# Altium PCB SourceSelection.PcbDoc
Units mm, origin at the board's own origin, x right, y up, seen from the top; angles counter-clockwise.
Board outline 152.4 x 101.6 mm, 2 copper layers (Top Layer, Bottom Layer); 18 components, 36 nets, 114 pads, 1 vias.
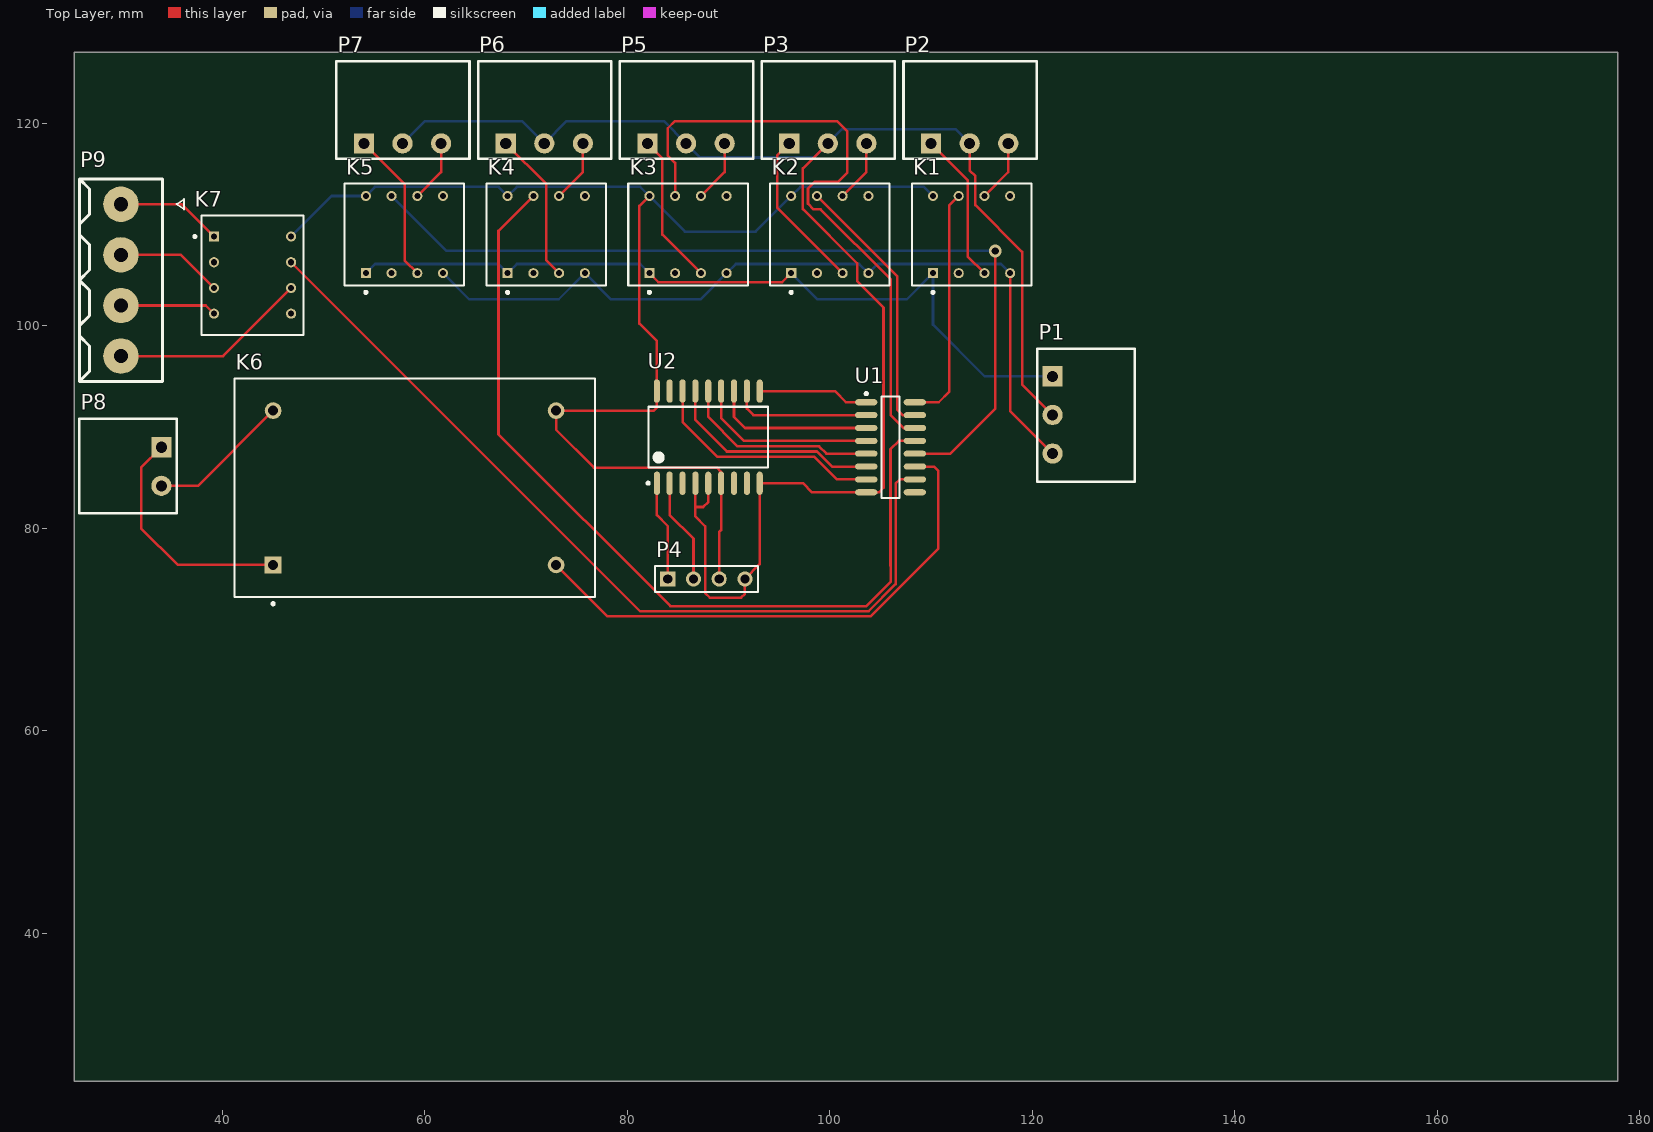
[diagram p0: Top Layer view]
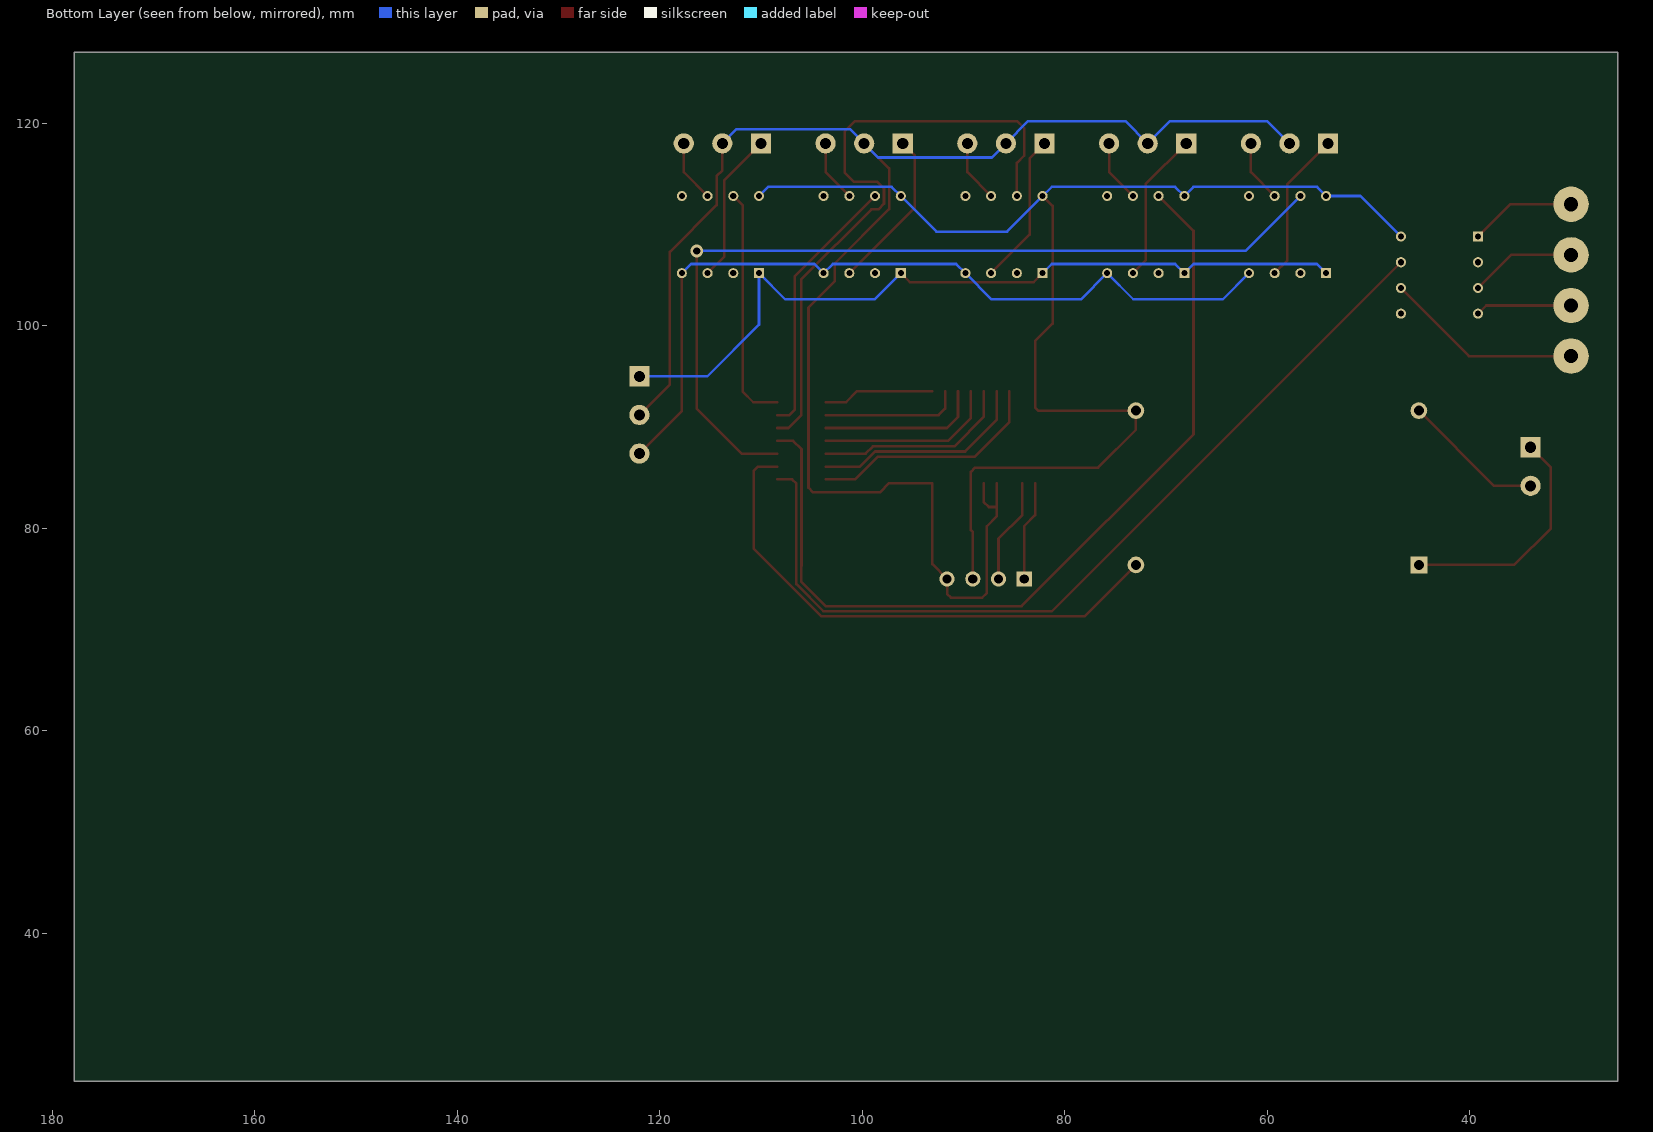
[diagram p1: Bottom Layer view, seen from below]

## Layer stack, top to bottom
Top Layer: signal copper 0.0356
Dielectric: dielectric 0.32, FR-4, Dk 4.8
Bottom Layer: signal copper 0.0356

## Board outline
25.4,25.4 177.8,25.4 177.8,127 25.4,127

## Design rules (kind name [scope] priority, off if disabled: settings)
Clearance [All] p1: gap=0.254
PolygonConnect [All] p1: connectstyle=Relief reliefconductorwidth=0.254 reliefentries=4 polygonreliefangle="90 Angle" airgapwidth=0.254
RoomDefinition "Source Selection" [InComponentClass('Source Selection')] p1: confinementstyle=ConfineIn formatcopy=TRUE lockcomponents=FALSE outline 178.943,27.051 397.51,27.051 397.51,65.659 178.943,65.659
RoutingVias [All] p1: holewidth=0.711 width=1.27 viastyle="Through Hole" minholewidth=0.711 minwidth=1.27 maxholewidth=0.711 maxwidth=1.27
SilkscreenOverComponentPads [All] p1: minsilkscreentomaskgap=0.254
SolderMaskExpansion [All] p1: expansion=0.102
Width [All] p1: maxlimit=0.254 minlimit=0.254 preferedwidth=0.254
27 further rules are at their usual default settings.

## Components (designator, comment, footprint, x,y, rotation, side; value= is the part's Value field where it differs from the comment)
K1 "Relay-DPDT" DIP-P8 114,109 r0 top
K2 "Relay-DPDT" DIP-P8 100,109 r0 top
K3 "Relay-DPDT" DIP-P8 86,109 r0 top
K4 "Relay-DPDT" DIP-P8 72,109 r0 top
K5 "Relay-DPDT" DIP-P8 58,109 r0 top
K6 "Relay-Standby B+" MODULE4 59,84 r0 top
K7 "Relay-Power 240V" DIP-P8 43,105 r270 top
P1 "Audio out" PH_TERM_3 122,95 r270 top
P2 "Audio 1 in" PH_TERM_3 110,118 r0 top
P3 "Audio 2 in" PH_TERM_3 96,118 r0 top
P4 "Header 4" HDR1X4 84,75 r0 top
P5 "Audio 3 in" PH_TERM_3 82,118 r0 top
P6 "Audio 4 in" PH_TERM_3 68,118 r0 top
P7 "Audio 5 in" PH_TERM_3 54,118 r0 top
P8 "Standby" PH_TERM_2 34,88 r270 top
P9 "Header 4" TERM_BLOCK_4_HORZ_RIACON01 30,112 r270 top
U1 "ULN2003AD" D016_N 106,88 r0 top
U2 "MCP23008-E/SO" SOIC-SO18_N 88,89 r90 top

## Footprints (in the part's own frame and the unit in brackets; to place one, negate y for a bottom-side part, rotate by r counter-clockwise, add the part's x,y. Pads: shape width x height; smd on the part's side, far side on the other; paste and mask are expansions set on the pad)
D016_N [mm] "SOIC, 16-Leads, Body 9.9x3.9mm, Pitch 1.27mm, IPC Medium Density"
  oval 2.2x0.6 smd: 1(-2.4,4.445) 2(-2.4,3.175) 3(-2.4,1.905) 4(-2.4,0.635) 5(-2.4,-0.635) 6(-2.4,-1.905) 7(-2.4,-3.175) 8(-2.4,-4.445) 9(2.4,-4.445) 10(2.4,-3.175) 11(2.4,-1.905) 12(2.4,-0.635) 13(2.4,0.635) 14(2.4,1.905) 15(2.4,3.175) 16(2.4,4.445)
  silkscreen extent -2.52,-5 0.9,5.42, body extent -2,-5 2,5, height 1.75
DIP-P8 [mm] "Dual-Pole Dual-Throw Relay; 8 Leads"
  rect 1x1 hole 0.6: 1(-3.81,-3.81)
  round 1 hole 0.6: 2(-1.27,-3.81) 3(1.27,-3.81) 4(3.81,-3.81) 5(3.81,3.81) 6(1.27,3.81) 7(-1.27,3.81) 8(-3.81,3.81)
  silkscreen extent -5.9,-5.82 5.9,5.05
HDR1X4 [mm] "Connector; Header; 4 Position"
  rect 1.5x1.5 hole 0.9: 1(0,0)
  round 1.5 hole 0.9: 2(2.54,0) 3(5.08,0) 4(7.62,0)
  silkscreen extent -1.27,-1.27 8.89,1.27
MODULE4 [mm] "DIP; 4 Round Pins; Row Space 27.94 mm; Pitch 15.24 mm"
  rect 1.65x1.65 hole 1: 1(-13.97,-7.62)
  round 1.65 hole 1: 2(-13.97,7.62) 3(13.97,-7.62) 4(13.97,7.62)
  silkscreen extent -17.8,-11.57 17.8,10.8, body extent -17.8,-10.8 17.8,10.8, height 14
PH_TERM_2 [mm] "Phoenix Terminal 2 way pluggable"
  rect 2x2 hole 1.1: 1(0,0)
  round 2 hole 1.1: 2(3.81,0)
  silkscreen extent -2.8,-8.1 6.5,1.5, body extent -2.65,-7.95 6.36,1.35, height 7.25
PH_TERM_3 [mm] "Phoenix Terminal 3 way pluggable"
  rect 2x2 hole 1.1: 1(0,0)
  round 2 hole 1.1: 2(3.81,0) 3(7.62,0)
  silkscreen extent -2.73,-1.5 10.43,8.1, body extent -2.56,-1.35 10.26,7.95, height 2.9
SOIC-SO18_N [mm] "SOIC, 18-Leads, Body 11.5x7.5mm, Pitch 1.27mm, IPC Medium Density"
  oval 2.3x0.6 smd: 1(-4.55,5.08) 2(-4.55,3.81) 3(-4.55,2.54) 4(-4.55,1.27) 5(-4.55,0) 6(-4.55,-1.27) 7(-4.55,-2.54) 8(-4.55,-3.81) 9(-4.55,-5.08) 10(4.55,-5.08) 11(4.55,-3.81) 12(4.55,-2.54) 13(4.55,-1.27) 14(4.55,0) 15(4.55,1.27) 16(4.55,2.54) 17(4.55,3.81) 18(4.55,5.08)
  silkscreen extent -4.67,-5.9 3,6.05, body extent -3.8,-5.95 3.8,5.95, height 2.65
TERM_BLOCK_4_HORZ_RIACON01 [mm]
  round 3.5 hole 1.4: 1(0,0) 2(5,0) 3(10,0) 4(15,0)
  silkscreen extent -2.5,-4.1 17.5,6.25, body extent -2.9,-3.8 17.5,3.9, height 10.05

## Part data
K1 K2 K3 K4 K5: "Dual-Pole Dual-Throw Relay"
K6: library part Relay-SPST, "Single-Pole Single-Throw Relay"
K7: library part Relay-DPDT, "Dual-Pole Dual-Throw Relay"
P1 P2 P3 P5 P6 P7: library part "Header 3", "Header, 3-Pin"
P4 P9: "Header, 4-Pin"
P8: library part "Header 2", "Header, 2-Pin"
U1: "Darlington Transistor Array"
U2: "8-Bit I/O Expander with Serial Interface, 18-Pin SOIC, Extended Temperature"

## Via types
v1: diameter 1.27, hole 0.711, Top Layer to Bottom Layer, 1 vias

## Nets (pads, with @x,y where several pads share a name; then routed paths per layer and width w, separated by ;. In a path a pad name is that pad's centre, name@x,y a point inside that pad or via, vN(x,y) a via of type N, cw(c..) or ccw(c..) an arc to the next point about the centre after c; other vN are vias at no path point)
AU_L: K1.1 K2.1 K3.1 K4.1 K5.1 P1.1 | length 79.4
  Top Layer w0.254: K3.1 83.088,104.292 95.292,104.292 K2.1
  Bottom Layer w0.254: K5.1 55.096,106.096 67.284,106.096 K4.1 69.096,106.096 81.284,106.096 K3.1 ; K2.1 98.78,102.6 107.6,102.6 K1.1 110.19,100.11 115.3,95 P1.1
AU_R: K1.4 K2.4 K3.4 K4.4 K5.4 P1.3 | length 81.3
  Top Layer w0.254: K1.4 117.81,91.57 P1.3
  Bottom Layer w0.254: K5.4 64.384,102.616 73.236,102.616 K4.4 78.4,102.6 87.22,102.6 K3.4 90.716,106.096 102.904,106.096 K2.4 104.716,106.096 116.904,106.096 K1.4
GND: P1.2 P2.2 P3.2 P4.4 P5.2 P6.2 P7.2 U1.8 U2.4 U2.5 U2.9 | length 173.6
  Top Layer w0.254: U2.4 86.73,82.1 ; U2.5 88,82.6 87.5,82.1 86.73,82.1 ; P3.2 97.341,115.531 97.341,111.527 102.7,106.168 102.7,104.4 105.3,101.8 105.3,84.015 104.84,83.555 U1.8 98.245,83.555 97.35,84.45 U2.9 93.08,76.46 P4.4 91.62,73.52 91.252,73.152 88.148,73.152 87.7,73.6 87.7,80.2 86.73,81.17 86.73,82.1 ; P2.2 113.81,115.349 114.376,114.783 114.376,111.912 118.989,107.3 118.989,94.201 P1.2
  Bottom Layer w0.254: P7.2 60.01,120.2 69.61,120.2 P6.2 74.01,120.2 83.61,120.2 P5.2 87.199,116.611 98.421,116.611 P3.2 101.215,119.405 112.405,119.405 P2.2
NetK1_3: K1.3 P2.1 | length 15
  Top Layer w0.254: P2.1 113.614,114.386 113.614,106.846 K1.3
NetK1_6: K1.6 P2.3 | length 6.2
  Top Layer w0.254: K1.6 117.62,115.16 P2.3
NetK1_7: K1.7 U1.16 | length 23.5
  Top Layer w0.254: U1.16 110.758,92.445 111.785,93.472 111.785,111.865 K1.7
NetK2_3: K2.3 P3.1 | length 16
  Top Layer w0.254: P3.1 94.8,116.8 94.8,111.66 K2.3
NetK2_6: K2.6 P3.3 | length 6.2
  Top Layer w0.254: K2.6 103.62,115.16 P3.3
NetK2_7: K2.7 U1.15 | length 26.4
  Top Layer w0.254: K2.7 106.68,104.86 106.68,91.683 107.188,91.175 U1.15
NetK3_3: K3.3 P5.1 | length 15
  Top Layer w0.254: P5.1 83.464,116.536 83.464,108.996 K3.3
NetK3_6: K3.6 P5.3 | length 6.2
  Top Layer w0.254: K3.6 89.62,115.16 P5.3
NetK3_7: K3.7 U1.14 | length 63.1
  Top Layer w0.254: K3.7 84.73,116.07 84,116.8 84,119.5 84.7,120.2 100.7,120.2 101.727,119.173 101.727,115.127 100.8,114.2 98.5,114.2 97.849,113.549 97.849,112.051 98.4,111.5 99.1,111.5 106,104.6 106,91.18 107.275,89.905 U1.14
NetK4_3: K4.3 P6.1 | length 15
  Top Layer w0.254: P6.1 72.009,113.991 72.009,106.451 K4.3
NetK4_6: K4.6 P6.3 | length 6.2
  Top Layer w0.254: K4.6 75.62,115.16 P6.3
NetK4_7: K4.7 U1.13 | length 87.5
  Top Layer w0.254: K4.7 67.285,109.365 67.285,89.281 84.25,72.316 103.616,72.316 106,74.7 106,76.298 105.992,76.306 105.992,87.806 106.821,88.635 U1.13
NetK5_3: K5.3 P7.1 | length 15
  Top Layer w0.254: P7.1 58.014,113.986 58.014,106.446 K5.3
NetK5_6: K5.6 P7.3 | length 6.2
  Top Layer w0.254: K5.6 61.62,115.16 P7.3
NetK5_7: K5.7 U1.12 | length 87.2
  Top Layer w0.254: U1.12 111.901,87.365 116.332,91.796 v1(116.332,107.391)
  Bottom Layer w0.254: K5.7 62.149,107.391 v1(116.332,107.391)
NetK6_1: K6.1 P8.1 | length 23.4
  Top Layer w0.254: P8.1 32,86 32,80 35.62,76.38 K6.1
NetK6_2: K6.2 P8.2 | length 14.1
  Top Layer w0.254: P8.2 37.6,84.19 K6.2
NetK6_3: K6.3 U1.11 | length 52.8
  Top Layer w0.254: K6.3 78.05,71.3 104.037,71.3 110.7,77.963 110.7,85.7 110.305,86.095 U1.11
NetK7_1: K7.1 P9.1 | length 10.5
  Top Layer w0.254: P9.1 36,112 K7.1
NetK7_3: K7.3 P9.2 | length 10.5
  Top Layer w0.254: P9.2 35.92,107 K7.3
NetK7_4: K7.4 P9.3 | length 9.5
  Top Layer w0.254: P9.3 38.38,102 K7.4
NetK7_6: K7.6 P9.4 | length 19.6
  Top Layer w0.254: P9.4 40.08,97 K7.6
NetK7_7: K7.7 U1.10 | length 87.1
  Top Layer w0.254: K7.7 81.272,71.808 103.826,71.808 106.508,74.49 106.508,76.508 106.5,76.516 106.5,84.4 106.925,84.825 U1.10
NetU1_1: U1.1 U2.10 | length 11
  Top Layer w0.254: U2.10 100.495,93.55 101.6,92.445 U1.1
NetU1_2: U1.2 U2.11 | length 13.8
  Top Layer w0.254: U2.11 91.81,91.821 92.456,91.175 U1.2
NetU1_3: U1.3 U2.12 | length 16.1
  Top Layer w0.254: U2.12 90.54,91 91.635,89.905 U1.3
NetU1_4: U1.4 U2.13 | length 17.9
  Top Layer w0.254: U2.13 89.27,90.9 91.535,88.635 U1.4
NetU1_5: U1.5 U2.14 | length 19.7
  Top Layer w0.254: U2.14 88,91 90.908,88.092 98.95,88.092 99.677,87.365 U1.5
NetU1_6: U1.6 U2.15 | length 21.6
  Top Layer w0.254: U2.15 86.73,90.7 89.846,87.584 98.739,87.584 100.228,86.095 U1.6
NetU1_7: U1.7 U2.16 | length 23.5
  Top Layer w0.254: U2.16 85.46,90.5 88.884,87.076 98.449,87.076 100.7,84.825 U1.7
SCL: P4.1 U2.1 | length 9.9
  Top Layer w0.254: U2.1 82.92,81.3 84,80.22 P4.1
SDA: P4.2 U2.2 | length 10.4
  Top Layer w0.254: U2.2 84.19,81.331 86.54,78.981 P4.2
VCC: K1.8 K2.8 K3.8 K4.8 K5.8 K6.4 K7.8 P4.3 U2.6 U2.18 | length 132.8
  Top Layer w0.254: K3.8 81.204,111.824 81.204,100.217 82.92,98.501 U2.18 82.92,91.92 82.62,91.62 K6.4 72.97,89.73 76.719,85.981 88.862,85.981 89.27,85.573 U2.6 89.27,79.819 89.08,79.629 P4.3
  Bottom Layer w0.254: K7.8 50.81,112.81 K5.8 55.096,113.716 67.284,113.716 K4.8 69.096,113.716 81.284,113.716 K3.8 85.704,109.296 92.676,109.296 K2.8 97.096,113.716 109.284,113.716 K1.8
pads on no net: K1.2 K1.5 K2.2 K2.5 K3.2 K3.5 K4.2 K4.5 K5.2 K5.5 K7.2 K7.5 U1.9 U2.3 U2.7 U2.8 U2.17